# Altium PCB Fonte 12V-2A.PcbDoc
Units mil, origin at the board's own origin, x right, y up, seen from the top; angles counter-clockwise.
Board outline 5057.06 x 2348.4 mil, 2 copper layers (Top Layer, Bottom Layer), stack 61.855 mil thick; 51 components, 27 nets, 125 pads, 0 vias.
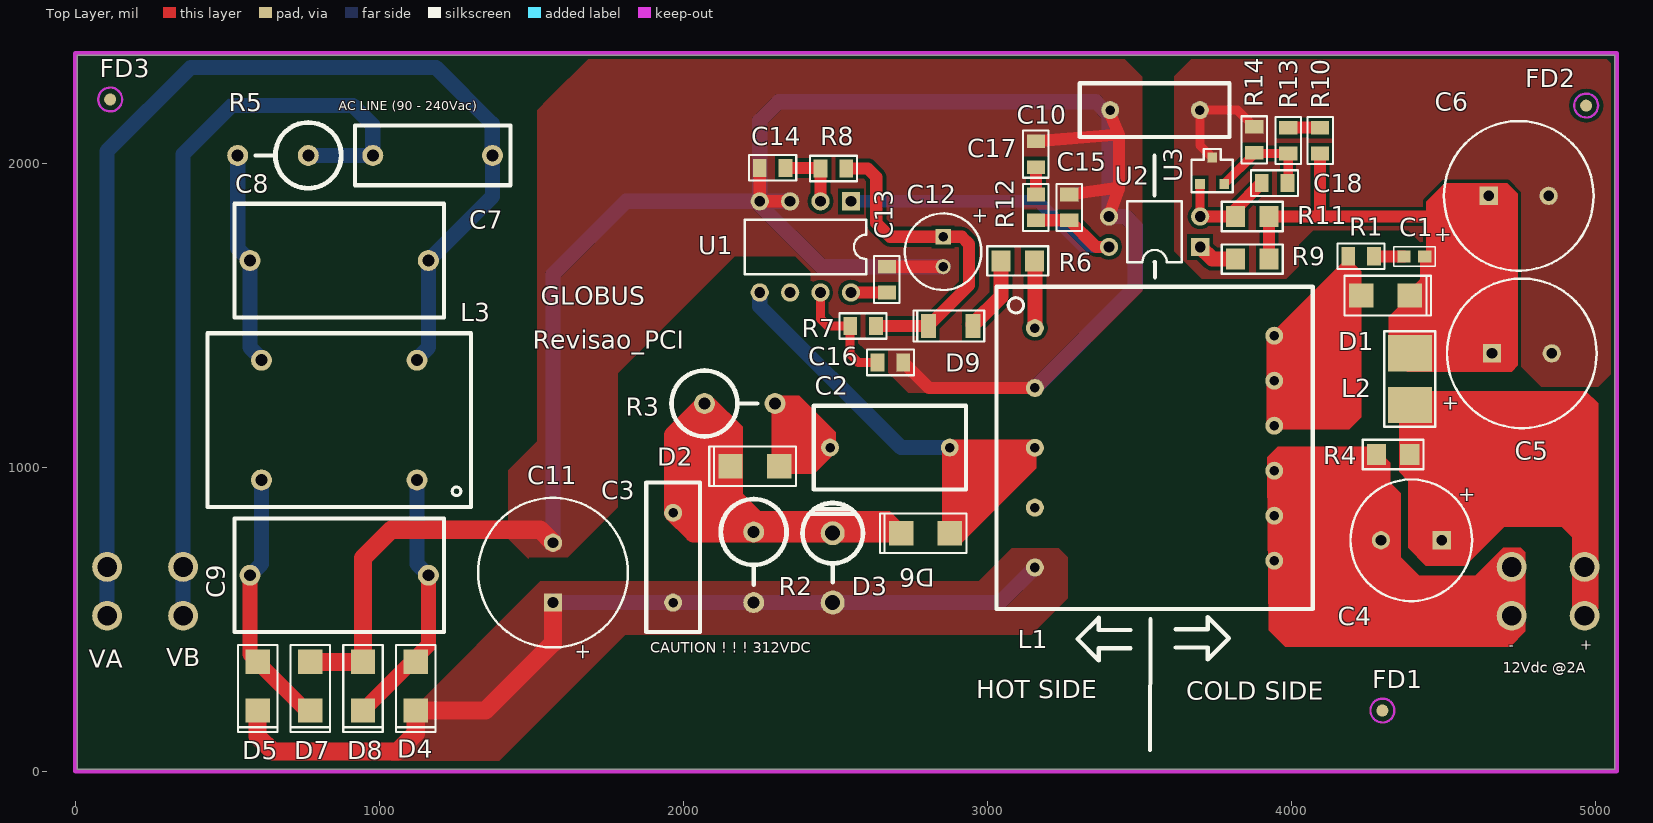
[diagram p0: Top Layer view]
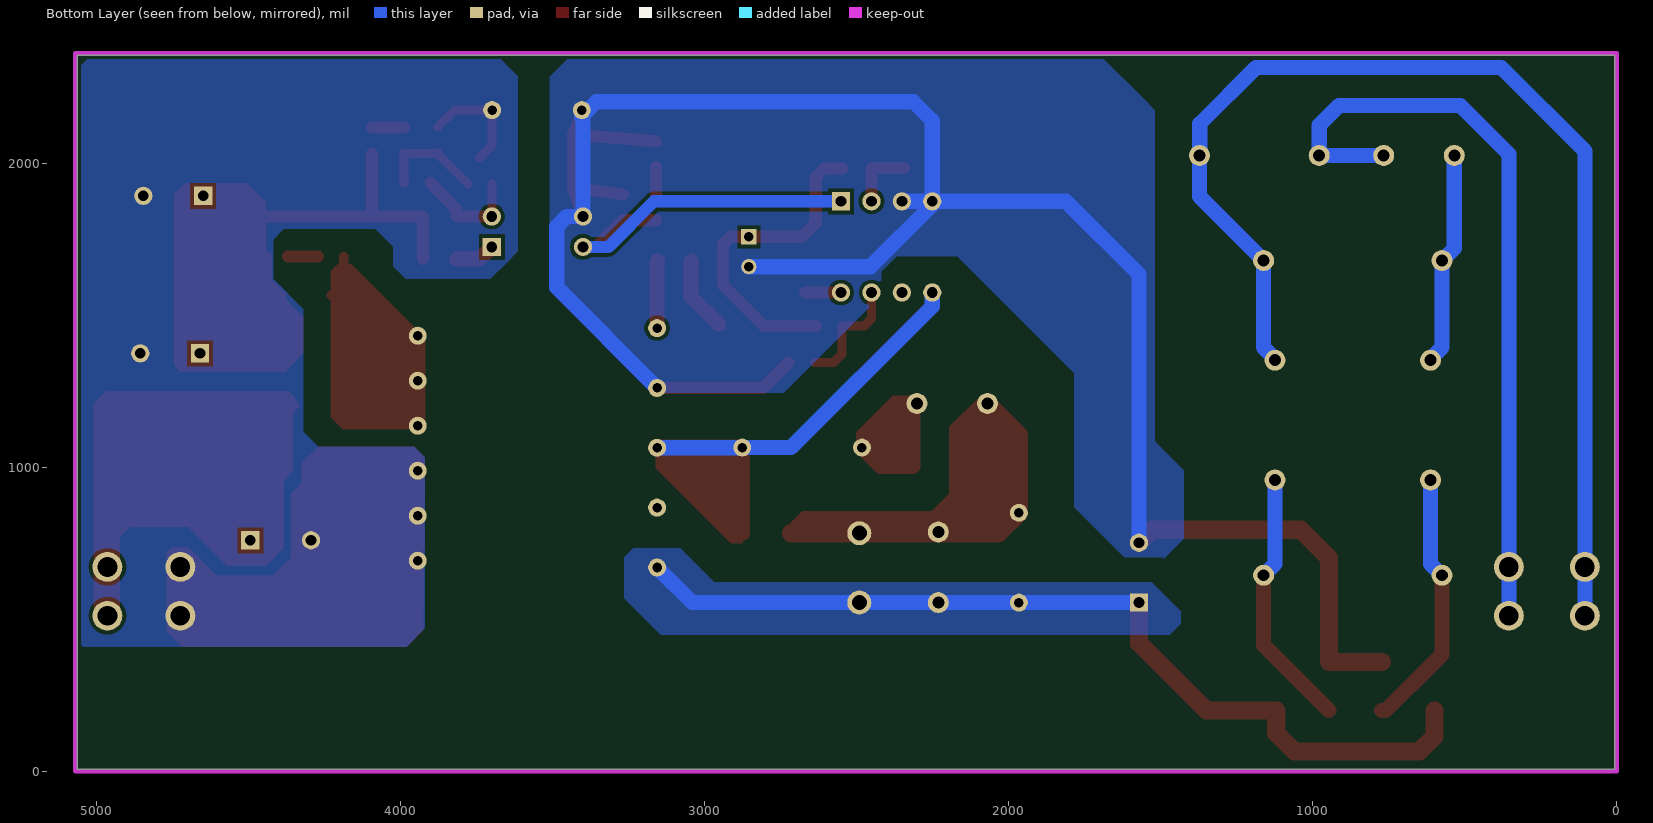
[diagram p1: Bottom Layer view, seen from below]
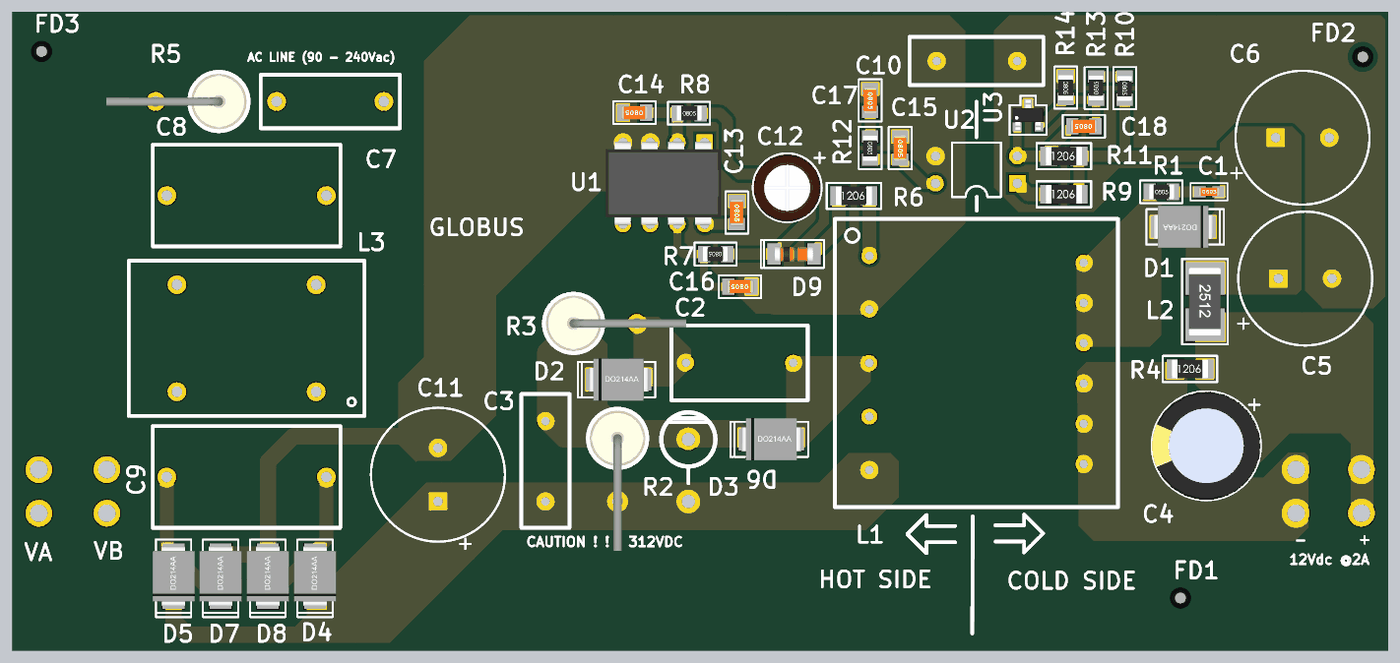
[diagram p2: 3D render of the assembled board from above, using the file's embedded part models]

## Layer stack, top to bottom
Top Solder: solder mask 0.4, Solder Resist, Dk 3.5
Top Layer: signal copper 1.4
Dielectric 1: dielectric 59.0551, FR-4, Dk 4.8
Bottom Layer: signal copper 1.4
Bottom Solder: solder mask 0.4, Solder Resist, Dk 3.5

## Board outline
6.9,6.9 6.9,2355.3 5063.96,2355.3 5063.96,6.9

## Design rules (kind name [scope] priority, off if disabled: settings)
Clearance [All] p1: gap=12
MinimumSolderMaskSliver [All] p1: minsoldermaskwidth=1
PlaneConnect [All] p1: planeconnectstyle=Direct reliefexpansion=20 reliefentries=4 reliefconductorwidth=10 reliefairgap=10
PolygonConnect [All] p1: connectstyle=Direct reliefconductorwidth=10 reliefentries=4 polygonreliefangle="90 Angle" airgapwidth=10
RoutingVias [All] p1: holewidth=28 width=50 viastyle="Through Hole" minholewidth=28 minwidth=50 maxholewidth=28 maxwidth=50
SilkToSilkClearance [All] p1: silktosilkclearance=1
SilkToSolderMaskClearance [IsPad] p1: minsilkscreentomaskgap=1 clearancetoexposedcopper=TRUE
SolderMaskExpansion [All] p1: expansion=4
UnpouredPolygon [All] p1: allowunpoured=FALSE
Width [All] p1: maxlimit=100 minlimit=10 preferedwidth=10
25 further rules are at their usual default settings.

## Components (designator, comment, footprint, x,y, rotation, side; value= is the part's Value field where it differs from the comment)
C1 "470pF 200V" C0603 4405,1694 r0 top
C2 "100pF 250VAC" CAP_DE 2483,1065 r0 top
C3 "4,7nF 250VAC Y2" WYO 1966.7,850.28 r270 top
C4 "220uF 63V" CAP200P_D10H20 4395,760 r180 top
C5 "1000uF 25V" CAP5_D12.5H25 4660,1375 r0 top
C6 "1000uF 25V" CAP5_D12.5H25 4650,1893 r0 top
C7 "47nF 250VAC" CAP_R75_H11mm_L13mm 1376.7,2030 r270 top
C8 "0.33uF 250VAC" R75 1161.7,1680 r270 top
C9 "0.33uF 250VAC" R75 1161.7,645 r270 top
C10 "4,7nF 250VAC Y2" WYO 3404.33,2175 r0 top
C11 "68uF 400V" CAP5_D12.5H31.5 1571.7,555 r90 top
C12 "100uF 25V" CAP100P_D6.3H11 2855,1758.43 r270 top
C13 "470nF 50V" C0805 2670,1617.5 r270 top
C14 "4,7nF 50V" C0805 2294.2,1985 r180 top
C15 "10nF 50V" C0805 3270,1855 r270 top
C16 "100nF 50V" C0805 2681.7,1345 r180 top
C17 "470nF 50V" C0805 3160,2030 r270 top
C18 "10nF 50V" C0805 3945,1935 r180 top
D1 "MURS360S" DO214AA-SMB 4310,1565 r0 top
D2 "MURS360S" DO214AA-SMB 2235.66,1003.26 r180 top
D3 "1.5KE220A" 1.5KE 2491.7,555 r180 top
D4 "S3MB" DO214AA-SMB 1120,280 r270 top
D5 "S3MB" DO214AA-SMB 600,280 r270 top
D6 "MURS360S" DO214AA-SMB 2796.7,783.34 r180 top
D7 "S3MB" DO214AA-SMB 773.33,280 r270 top
D8 "S3MB" DO214AA-SMB 946.67,280 r270 top
D9 "1N4148" SOD80-MINIMELF 2880,1465 r180 top
FD1 "Fiducial" Fiducial 4300,200 r0 top
FD2 "Fiducial" Fiducial 4970,2190 r0 top
FD3 "Fiducial" Fiducial 115,2210 r0 top
L1 "CVP 53-001" "CVP 53-001" 3156.7,1457.95 r270 top
L2 "2,2uH" l2512 4390,1290 r270 top
L3 "SS11V-04350-CH" SS11V-04350-CH 1301.46,870 r180 top
R1 "22R 1%" R0805 4229.85,1694 r0 top
R2 "22K 5% 2W" RES2W_L16mm_D5.5 2231.7,787.28 r270 top
R3 "1K 5% 2W" RES2W_L16mm_D5.5 2070,1210 r0 top
R4 "1K 1%" R1206 4335,1042.28 r0 top
R5 "3R 5% 3W" RES2W_L16mm_D5.5 766.7,2026.06 r180 top
R6 "15R 1%" R1206 3100,1679 r0 top
R7 "10R 1%" R0805 2591.7,1465 r180 top
R8 "3K 1%" R0805 2494.2,1983.03 r0 top
R9 "68R 1%" R1206 3871.7,1685 r0 top
R10 "10K 1%" R0805 4095,2075 r270 top
R11 "1K 1%" R1206 3871.7,1825 r0 top
R12 "3K3 1%" R0805 3160,1855 r270 top
R13 "3K3 1%" R0805 3990,2075 r90 top
R14 "3K3 1%" R0805 3878.34,2077.5 r270 top
Revisao_PCI "*" NULL_FOOTPRINT 5790,145 r90 top (schematic designator =Revisao_PCI)
U1 "VIPer53EDIP-E" DIP8 2551.7,1875 r270 top
U2 "LTV-817A" DIP4 3700.4,1725 r180 top
U3 "TL431" SOT23 3740,1976.16 r0 top

## Footprints (in the part's own frame and the unit in brackets; to place one, negate y for a bottom-side part, rotate by r counter-clockwise, add the part's x,y. Pads: shape width x height; smd on the part's side, far side on the other; paste and mask are expansions set on the pad)
1.5KE [mm] "Case Style 1.5KE"
  round 2 hole 1.25: 1(0,0) 2(0,-5.8)
  silkscreen extent -2.52,-8.32 2.52,-1.7
C0603 [mil]
  rect 44x40 smd: 1(-34,0) 2(34,0)
  silkscreen extent -68,-32 68,32, body extent -39,-15 39,16, height 31
C0805 [mil]
  rect 45x60 smd: 1(-42.5,0) 2(42.5,0)
  silkscreen extent -78,-42 78,42, body extent -49,-24 49,25, height 31
CAP5_D12.5H25 [mil]
  round 60 hole 35.5: 1(196.85,0)
  rect 60x60 hole 35.5: 2(0,0)
  silkscreen extent -148,-246 344,246
CAP5_D12.5H31.5 [mil]
  round 60 hole 35.5: 1(196.85,0)
  rect 60x60 hole 35.5: 2(0,0)
  silkscreen extent -147,-246 344,246
CAP100P_D6.3H11 [mil]
  round 50 hole 31.5: 1(98.43,0)
  rect 50x50 hole 31.5: 2(0,0)
  silkscreen extent -77,-126 175,126, body extent -74,-124 174,124, height 433
CAP200P_D10H20 [mil]
  round 60 hole 35.5: 1(100,0)
  rect 60x60 hole 35.5: 2(-100,0)
  silkscreen extent -200,-200 200,200, body extent -200,-200 200,200, height 800
CAP_DE [mm] "Safety Standard Certified Ceramic Capacitors"
  round 1.5 hole 0.8: 1(0,0) 2(10,0)
  silkscreen extent -1.36,-3.5 11.36,3.5
CAP_R75_H11mm_L13mm [mm] "R75 Series Single Metallized Polypropylene Film"
  round 1.75 hole 1: 1(0.1,-0.1) 2(0.1,-10.1)
  silkscreen extent -2.4,-11.6 2.6,1.4
"CVP 53-001" [mm] "CVP 53-001"
  round 1.5 hole 0.8: 1(0,0) 2(5,0) 3(10,0) 4(15,0) 5(20,0) 6(19.435,20) 7(15.675,20) 8(11.915,20) 9(8.155,20) 10(4.395,20) 11(0.635,20)
  silkscreen extent -3.46,-3.21 23.46,23.21
DIP4 [mil]
  rect 60x60 hole 35.5: 1(0,0)
  round 60 hole 35.5: 2(0,-100) 3(300,-100) 4(300,0)
  silkscreen extent 60,-150 240,50
DIP8 [mil]
  rect 60x60 hole 35.5: 1(0,0)
  round 60 hole 35.5: 2(0,-100) 3(0,-200) 4(0,-300) 5(300,-300) 6(300,-200) 7(300,-100) 8(300,0)
  silkscreen extent 60,-350 240,50, body extent -3,-365 303,60, height 177
DO214AA-SMB [mil]
  rect 80x80 smd: 1(-80,0) 2(80,0)
  silkscreen extent -135,-65 150,65, body extent -110,-78 110,78, height 106
Fiducial [mm]
  round 1 smd mask+0.5: 1(0,0)
  Top Layer keep-out circle w0.2: c0,0 r1
l2512 [mil]
  rect 120x145 smd: 1(-85,0) 2(85,0)
  silkscreen extent -157,-84 157,84, body extent -125,-59 125,59, height 63
NULL_FOOTPRINT [mil]
R75 [mm] "R75 Series Single Metallized Polypropylene Film"
  round 1.75 hole 1: 1(0,0) 2(0,-14.9)
  silkscreen extent -4.75,-16.2 4.75,1.3
R0805 [mil]
  rect 45x60 smd: 1(-42.5,0) 2(42.5,0)
  silkscreen extent -78,-42 78,42, body extent -44,-27 46,27, height 34
R1206 [mil]
  rect 63x70 smd: 1(-55,0) 2(55,0)
  silkscreen extent -100,-48 100,48, body extent -66,-34 66,34, height 33
RES2W_L16mm_D5.5 [mm] "Carbon Film Resistors"
  round 1.75 hole 1: 1(0,0) 2(5.9,0)
  silkscreen extent -2.75,-2.75 4.4,2.75, body extent -2.6,-2.6 10.5,2.6, height 23.83
SOD80-MINIMELF [mm]
  rect 1.25x2 smd: 1(-1.875,0) 2(1.875,0)
  silkscreen extent -2.8,-1.3 3.1,1.3, body extent -1.8,-0.74 1.8,0.76, height 1.55
SOT23 [mil]
  rect 32x32 smd: 1(-40,-44) 2(0,43) 3(40,-44)
  silkscreen extent -68,-72 68,71, body extent -57,-55 57,55, height 51
SS11V-04350-CH [mm] "SS Coils, SS11V/H-CH Type"
  round 1.75 hole 1: 1(17.5,-2.25) 2(4.5,-2.25) 3(17.5,-12.25) 4(4.5,-12.25)
  silkscreen extent 0,-14.5 22,0
WYO [mm] "AC Line Rated Ceramic Disc Capacitors"
  round 1.5 hole 0.8: 1(0,0) 2(7.5,0)
  silkscreen extent -2.54,-2.25 9.96,2.25

## Part data
C1: library part "CC 470pF 200V 0603"
C2: library part "CC 100pF 250VAC"
C3 C10: library part "CC 4,7nF 250VAC Y2"
C4: library part "CE 220uF 63V PTH", "C.Elet.220uF 63V 20% Radial"
C5 C6: library part "CE 1000uF 25V PTH", "C.Elet.1000uF 25V 20% Radial"
C7: library part "CC 47nF 250VAC"
C8 C9: library part "CC 0.33uF 250VAC"
C11: library part "CE 68uF 400V PTH", "C.Elet.68uF 400V 20% Radial"
C12: library part "CE 100uF 25V PTH", "C.Elet.1000uF 25V 20% Radial"
C13 C17: library part "CC 470nF 50V 0805"
C14: library part "CC 4,7nF 50V 0805"
C15 C18: library part "CC 10nF 50V 0805"
C16: library part "CC 100nF 50V 0805"
D1 D2 D6: library part "D MURS360S SMB", "Dio.Ultra Fast Rectifier SMT 600V 3A SMC MURS360S"
D3: library part "D 1.5KE220A 1.5KE", "D 1.5KE220A 1.5KE"
D4 D5 D7 D8: library part "D S3MB DO214AA", "D S3MB DO214AA"
D9: library part "D 1N4148 SMD", "Diodo 1N4148 (LL4148) MINI MELF/SOD80"
L1: library part "IND CVP 53-001", "IND CVP 53-001"
L2: library part "IND 2,2uH 2512 SMD", "IND 2,2uH 2512 SMD"
L3: library part "IND SS11V-04350-CH CHOKE PTH", "IND SS11V-04350-CH CHOKE PTH"
R1: library part "RES 22R 1% 0805 0.5W", "RES 22R 1% 0805 0.5W"
R2: library part "RES 22K 5% 2W PTH", "RES 22K 5% 2W PTH"
R3: library part "RES 1K 5% 2W PTH", "RES 1K 5% 2W PTH"
R4 R11: library part "RES 1K 1% 1206", "RES 1K 1% 1206"
R5: library part "RES 3R 5% 3W PTH", "RES 3R 5% 3W PTH"
R6: library part "RES 15R 1% 1206", "RES 15R 1% 1206"
R7: library part "RES 10R 1% 0805", "RES 10R 1% 0805"
R8: library part "RES 3K 1% 0805", "RES 3K 1% 0805"
R9: library part "RES 68R1% 1206", "RES 68R 1% 1206"
R10: library part "RES 10K 1% 0805", "RES 10K 1% 0805"
R12 R13 R14: library part "RES 3K3 1% 0805", "RES 3K3 1% 0805"
Revisao_PCI: library part "CODIGO PCI", "Preencher com o código da placa. Irá aparecer na serigrafia."
U1: library part "CI VIPer53E DIP-8", "CI VIPer53E DIP-8"
U2: library part "CI LTV-817A DIP4", "CI LTV-817A DIP4"
U3: library part "CI TL431 SOT23", "CI TL431 SOT23"

## Free pads (board coordinates)
  round 98.43 hole 64.96: 0(105,511.81) 0(105,672.44) 0(355,511.81) 0(355,672.44) 0(4725,511.81) 0(4725,672.44) 0(4965,511.81) 0(4965,672.44)

## Nets (pads, with @x,y where several pads share a name; then routed paths per layer and width w, separated by ;. In a path a pad name is that pad's centre, name@x,y a point inside that pad or via, vN(x,y) a via of type N, cw(c..) or ccw(c..) an arc to the next point about the centre after c; other vN are vias at no path point)
0: C10.1 C11.1 C12.1 C13.1 C14.2 C15.1 C16.1 C17.1 D7.1 D8.1 L1.2 U1.3 U1.4 U2.3 | length 7882.4
  Top Layer w40: C14.2 U1.4 U1.3 ; C13.1 C12.1 ; C16.1 2808.09,1261.1 L1.2 ; C17.1 3433.91,2095 ; C15.1 3433.91,1920 ; U2.3 3433.91,1920 ; C10.1 3400.4,2171.06 3433.91,2095 ; 3433.91,1920 3433.91,2095
  Top Layer w60: D7.1 D8.1 946.67,701.67 1040,795 1528.55,795 C11.1
  Bottom Layer w50: C11.1 1571.7,1635 1811.7,1875 U1.4 ; U1.3 U1.4 ; C12.1 2455,1660 2251.7,1863.3 U1.4 ; L1.2 3486.7,1591.1 3486.7,1792.5 3454.2,1825 U2.3 C10.1@3400.4,2151.06 ; C10.1@3404.33,2155 3356.83,2202.5 2314.2,2202.5 2251.7,2140 U1.4
12V: C4.2 L2.2 pad.0@4965,511.81 pad.0@4965,672.44 R4.2
GND: C4.1 C5.1 C6.1 C10.2 L1.6 L1.7 L1.8 pad.0@4725,511.81 pad.0@4725,672.44 R4.1 R14.1 U3.2 | length 374.1
  Top Layer w30: U3.2 3699.61,2059.56 C10.2 3823.34,2175 R14.1
NetC1_1: C1.1 R1.2 | length 98.7
  Top Layer w40: R1.2 C1.1
NetC1_2: C1.2 C5.2 C6.2 D1.2 L2.1 R9.2 R10.2 R11.2 | length 1247.5
  Top Layer w30: D1.2 4439,1614 C1.2
  Top Layer w40: R9.2 R11.2 4095,1825 ; R10.2 4095,1825 ; C6.2@4650,1891.06 4630.67,1891.06 4564.6,1825 4095,1825
NetC2_1: C2.1 D2.1 R3.2 | length 405.2
  Top Layer w50: R3.2 2315.66,1196.62 D2.1 2421.26,1003.26 C2.1
NetC2_2: C2.2 D6.1 L1.3 U1.5 | length 1425.8
  Top Layer w50: D6.1 C2.2
  Bottom Layer w50: U1.5 2251.7,1529.5 2716.2,1065 C2.2 2877.44,1064.25 L1.3 L1.3@3156.7,1063.34
NetC3_1: C3.1 D2.2 D3.2 D6.2 R2.1 R3.1 | length 1369.2
  Top Layer w60: R3.1 1966.7,1106.7 1966.7,1003.26 ; D2.2 1966.7,1003.26 ; D6.2 D3.2 2033.62,783.35 C3.1 1966.7,1003.26
NetC8_2: C8.2 L3.3 R5.2 | length 701.1
  Bottom Layer w50: R5.2 534.41,1720.67 C8.2 575.08,1394.69 L3.3@612.48,1357.28
NetC9_1: C9.1 D4.1 D8.2 L3.2 | length 868.1
  Top Layer w50: D8.2 1161.7,415.03 C9.1
  Bottom Layer w50: L3.2@1124.29,963.58 L3.2 1124.29,682.4 C9.1
NetC9_2: C9.2 D5.1 D7.2 L3.1 | length 869
  Top Layer w50: C9.2 575.08,384.92 D5.1 760,200 D7.2
  Bottom Layer w50: C9.2 612.48,682.4 L3.1 L3.1@612.48,963.58
NetC12_2: C12.2 D9.2 R7.1 R8.2 | length 1081.4
  Top Layer w40: R8.2@2547.5,1983.03 2606.97,1983.03 2635,1955 2635,1803.43 2680,1758.43 C12.2 2916.57,1758.43 2940,1735 2940,1598.82 D9.2 R7.1
NetC13_2: C13.2 U1.8 | length 118.3
  Top Layer w40: U1.8 C13.2
NetC14_1: C14.1 R8.1 U1.2 | length 211.2
  Top Layer w40: C14.1@2342.5,1985 2449.73,1985 R8.1 ; U1.2 R8.1@2451.7,1976.16
NetC15_2: C15.2 R12.2 U1.1 U2.4 | length 1187.5
  Top Layer w40: R12.2 C15.2 3357.5,1725 U2.4
  Bottom Layer w40: U1.1 3166.7,1875 3316.7,1725 U2.4
NetC16_2: C16.2 R7.2 U1.7 | length 388.3
  Top Layer w30: U1.7 2451.7,1488.3 2475,1465 R7.2 2549.2,1371.56 2575.75,1345 C16.2
NetC17_2: C17.2 R12.1 | length 90
  Top Layer w40: R12.1 C17.2
NetC18_1: C18.1 R13.1 R14.2 U3.3 | length 354.8
  Top Layer w30: U3.3 3878.34,2030.5 R14.2 3880.84,2032.5 R13.1 3990,1937.5 C18.1
NetC18_2: C18.2 R11.1 U2.2 U3.1 | length 369.2
  Top Layer w30: U3.1 3700,1825.4 U2.2
  Top Layer w40: U2.2 R11.1 3816.7,1849.2 C18.2
NetD1_1: D1.1 L1.9 L1.10 L1.11 R1.1 | length 442.7
  Top Layer w30: R1.1 4187.35,1607.65 D1.1
  Top Layer w50: L1.9 L1.10 L1.11
NetD9_1: D9.1 R6.1 | length 246.8
  Top Layer w50: D9.1@2953.82,1470 3045,1561.18 R6.1
NetL1_1: L1.1 R6.2 | length 221.7
  Top Layer w50: R6.2 3156.7,1677.3 L1.1
NetR9_1: R9.1 U2.1 | length 132.9
  Top Layer w50: U2.1 3740.4,1685 R9.1
NetR10_1: R10.1 R13.2 | length 105
  Top Layer w40: R13.2 R10.1
VA: C7.1 C8.1 L3.4 pad.0@105,511.81 pad.0@105,672.44 | length 3861.5
  Bottom Layer w50: pad.0@105,511.81 105,672.44 105,2040 380,2315 1186.7,2315 1371.7,2130 1371.7,2027.13 C7.1 1372.76,1891.06 C8.1 1161.7,1394.68 L3.4@1124.29,1357.28
VB: C7.2 pad.0@355,511.81 pad.0@355,672.44 R5.1 | length 2546.7
  Bottom Layer w50: pad.0@355,511.81 355,672.44 355,2030 515,2190 914.06,2190 979.06,2125 C7.2 R5.1
VDC: C3.2 C11.2 D3.1 D4.2 D5.2 L1.5 R2.2 | length 3035.3
  Top Layer w60: D5.2 600,115 650,65 1060,65 1120,125 D4.2 1350,200 1571.7,421.7 C11.2
  Bottom Layer w50: C11.2 C3.2 R2.2 D3.1 3041.14,555 L1.5
pads on no net: FD1.1 FD2.1 FD3.1 L1.4 U1.6

## Polygon pours and split planes (outlines as drawn)
VDC on Bottom Layer "Keep-Out Layer-No Net" (solid, remove dead copper, pour order 6): 1435,526.81 1529.49,621.3 1670,621.3 2968.18,621.3 3080.83,733.95 3235,733.95 3263.87,705.08 3265,703.95 3265,570 3145,450 1470,450 1435,485
GND on Bottom Layer "Keep-Out Layer-No Net" (solid, remove dead copper, pour order 2): 3920.34,1033.6 3955,1068.26 4271.74,1068.26 4320,1116.53 4320,1140 4320,1520 4420,1620 4420,1749.31 4385,1784.31 4084.31,1784.31 4055,1755 4025,1725 4025,1662 3983,1620 3944.1,1620 3705,1620 3650,1675 3615,1710 3615,2015 3615,2287.2 3690,2362.2 5012.8,2362.2 5070,2305 5070,435 5045,410 3980.34,410 3920.34,470
0 on Top Layer "Keep-Out Layer-No Net" (solid, remove dead copper, pour order 10): 3175,1245 3510,1580 3510,2285 3430,2365 1710,2365 1560,2215 1520,2175 1520,1710 1520,1085 1440,1005 1425,990 1425,795 1425,765 1490,700 1493.95,703.95 1620,703.95 1785,868.95 1785,1033.6 1785,1310 1910,1435 2170,1695 2368.46,1695 2420,1643.46 2420,1565 2740,1245
0 on Bottom Layer "Keep-Out Layer-No Net" (solid, remove dead copper, pour order 10): 3156.7,1261.1 3510,1614.41 3510,2285 3430,2365 1710,2365 1560,2215 1520,2175 1520,1710 1520,1085 1440,1005 1425,990 1425,795 1425,765 1490,700 1493.95,703.95 1620,703.95 1785,868.95 1785,1033.6 1785,1310 1910,1435 2170,1695 2368.46,1695 2420,1643.46 2420,1565 2740,1245 3175,1245
GND on Top Layer "Keep-Out Layer-No Net" (solid, remove dead copper, pour order 8): 4544.94,1265 5010,1265 5070,1325 5070,2310 5030,2350 3677.8,2350 3615,2287.2 3615,1710 3705,1620 3983,1620 4025,1662 4025,1735 4027.99,1735 4072.99,1780 4385,1780 4425,1740 4425,1575.06 4329.94,1480
VDC on Top Layer "Keep-Out Layer-No Net" (solid, remove dead copper, pour order 4): 1045,80 1110,145 1110,205 1530,625 2971.89,625 3050,703.11 3080.83,733.95 3235,733.95 3265,703.95 3265,625 3265,570 3145,450 1810,450 1635,275 1395,35 1032.14,35

## Keep-outs
Keep-Out Layer:
  lines w13.78: 0,0 5070.87,0 5070.87,2362.2 0,2362.2 0,0

## Other copper
Top Layer:
  pour cut-out: 4756.3,1330.32 4821.91,1264.71 4821.91,1261.1 4758.03,1261.1 4749.13,1270
  region net NetC2_2: 2875,1090 3146.7,1090 3161.7,1075 3161.7,996.7 2914.56,749.56 2876.88,749.56
  region net NetC2_1: 2305,1235 2382.23,1235 2502.2,1115.04 2502.2,1070.46 2435,1003.26 2300.36,1003.26
  region net NetC3_1: 2740,794.94 2679.94,855 2253.27,855 2195,913.27 2195,1132.8 2101.12,1226.67 2086.67,1226.67 1966.7,1106.7 1966.7,843.3 2040,770
  region net GND: 3920.34,985 3920.34,1033.6 3955,1068.26 4271.74,1068.26 4325,1015 4325,949.7 4360,914.7 4360,705 4421.5,643.5 4605.16,643.5 4696.66,735 4755,735 4770,720 4770,460 4719.99,410 3980,410 3925.34,464.66
  region net 12V: 4365,1250 4969.37,1250 5009.37,1210 5009.37,534.37 4980,505 4970,515 4935,515 4925,525 4925,770 4890,805 4700.67,805 4572.67,677.01 4442.99,677.01 4385,735 4385,955 4355,985 4355,1178.35 4330,1203.35
  region net NetC1_2: 4444.37,1694.24 4444.37,1874.37 4505,1935 4710,1935 4745,1900 4745,1335 4725,1315 4380,1315 4320,1375 4320,1495 4440,1615 4440,1645
  region net NetD1_1: 3944.1,1449.1 4165,1670 4205,1670 4230,1645 4230,1165 4190,1125 3955.99,1125 3944.1,1136.89

## Silkscreen, mask and mechanical layers (free items; w line width, h text height)
Top Overlay:
  lines w13.78: 3471.7,405 3366.7,405 3366.7,365 3296.7,435 3366.7,505 3366.7,465 3471.7,465 ; 3535,70 3536.7,500 ; 3550.4,1675 3551.7,1675 3551.7,1625 ; 3550.4,1895 3550.4,2025 ; 3620.4,407.64 3725.4,407.64 3725.4,367.64 3795.4,437.64 3725.4,507.64 3725.4,467.64 3620.4,467.64
  text "AC LINE (90 - 240Vac)" at 866.7,2175 h30
  text "GLOBUS" at 1531.7,1535 h60
  text "+" at 4950,400 h35
  text "-" at 4715,397.83 h35
  text "CAUTION ! ! ! 312VDC" at 1891.7,390 h35
  text "VB" at 300,345 h60
  text "VA" at 45,340 h60
  text "12Vdc @2A" at 4695,325 h35
  text "HOT SIDE" at 2963.32,240 h60
  text "COLD SIDE" at 3655,235 h60
Board Outline:
  lines w13.78: 0,0 0,2362.2 5070.87,2362.2 5070.87,0 0,0

## Text inside footprints (layer, text, board x,y; h text height)
C4: Top Overlay "+" at 4607.24,930.27 h50 r180
C5: Top Overlay "+" at 4495,1190 h50
C6: Top Overlay "+" at 4470,1743 h50
C11: Top Overlay "+" at 1691.7,362.99 h50 r90
C12: Top Overlay "+" at 2955,1855 h50 r270